# Altium PCB PCB_esp32_with_RTC_and_SD_card_2024-11-04.pcbdoc
Units mil, origin at the board's own origin, x right, y up, seen from the top; angles counter-clockwise.
Board outline 4380 x 3705 mil, 2 copper layers (Top Layer, Bottom Layer); 41 components, 29 nets, 177 pads, 50 vias.
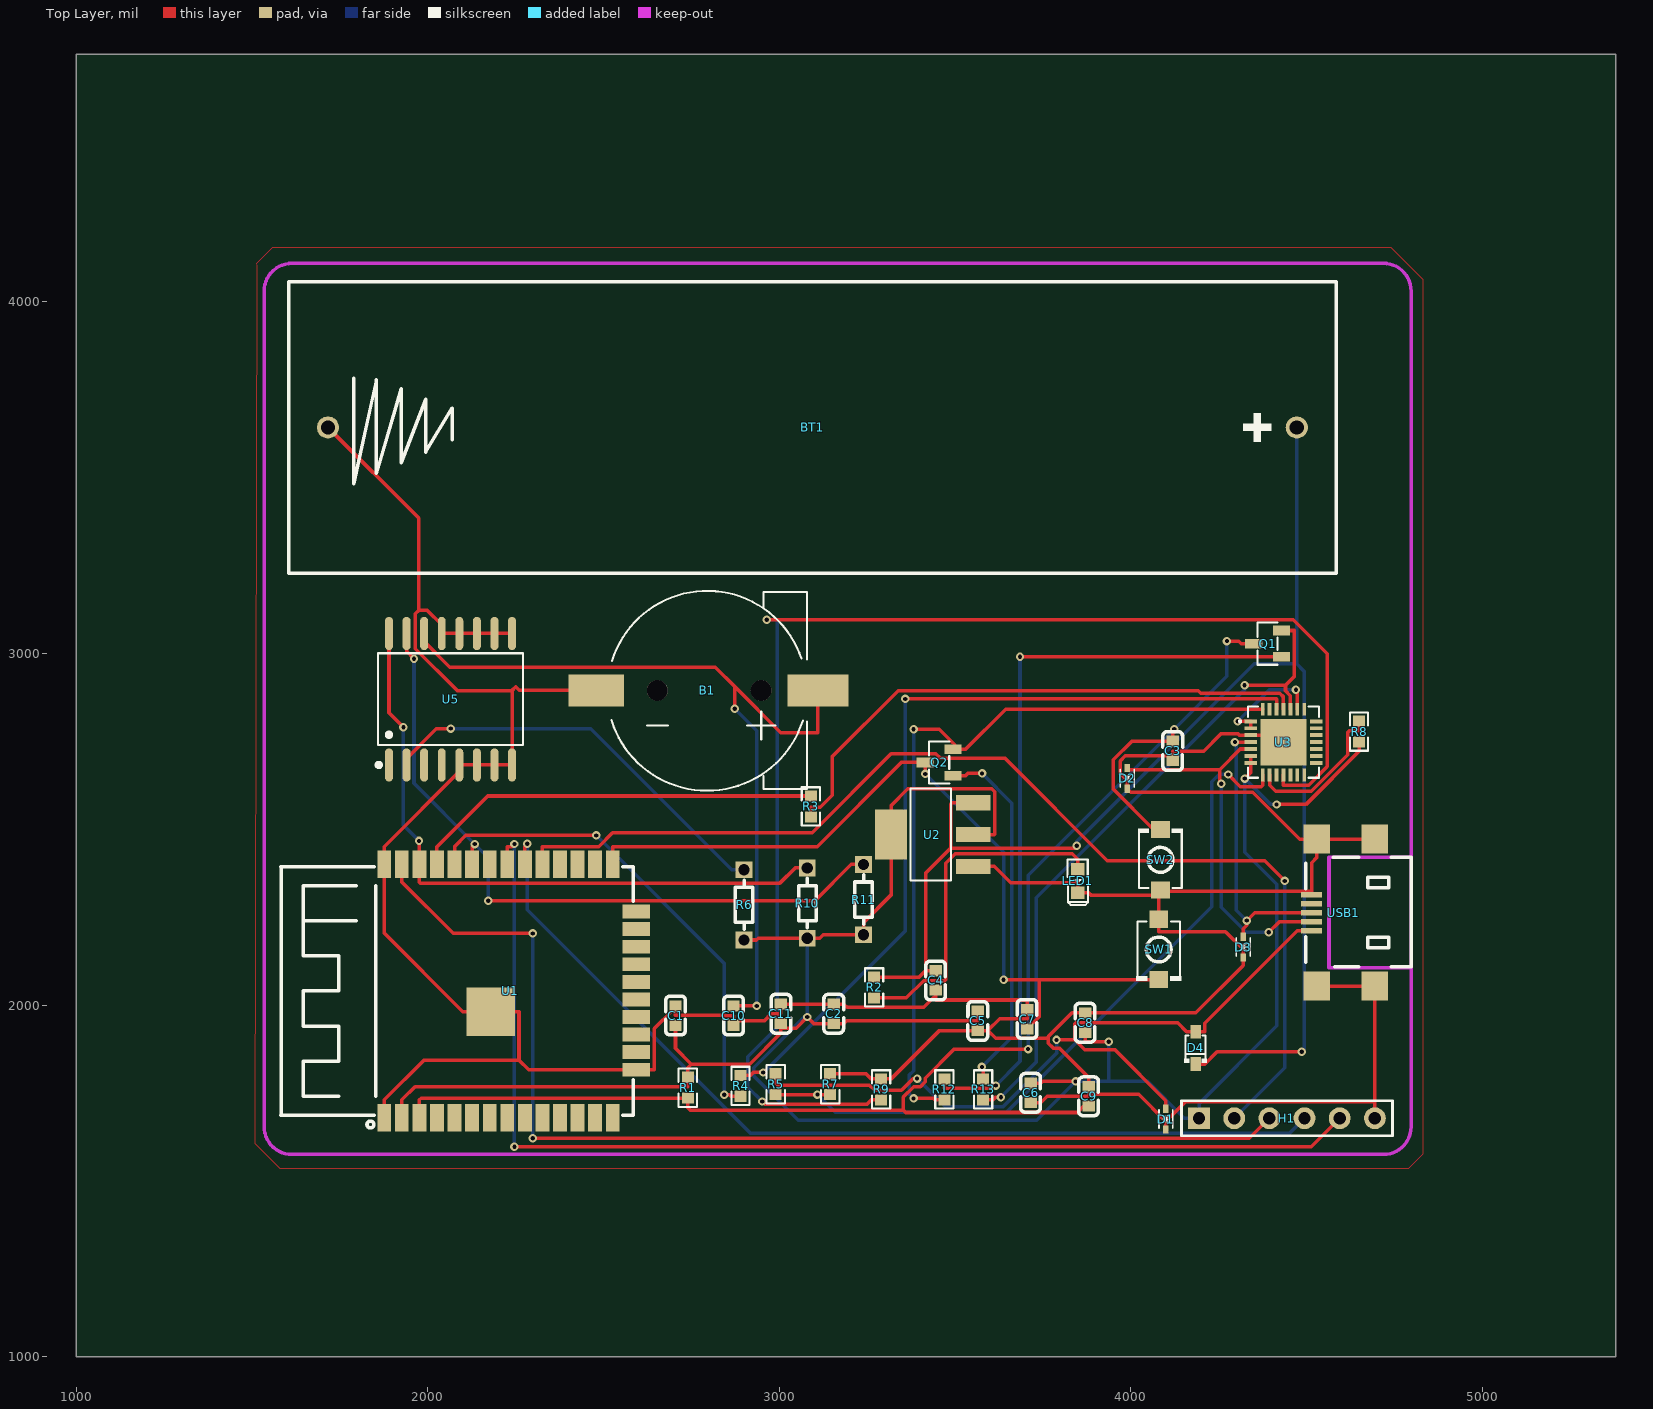
[diagram p0: Top Layer view]
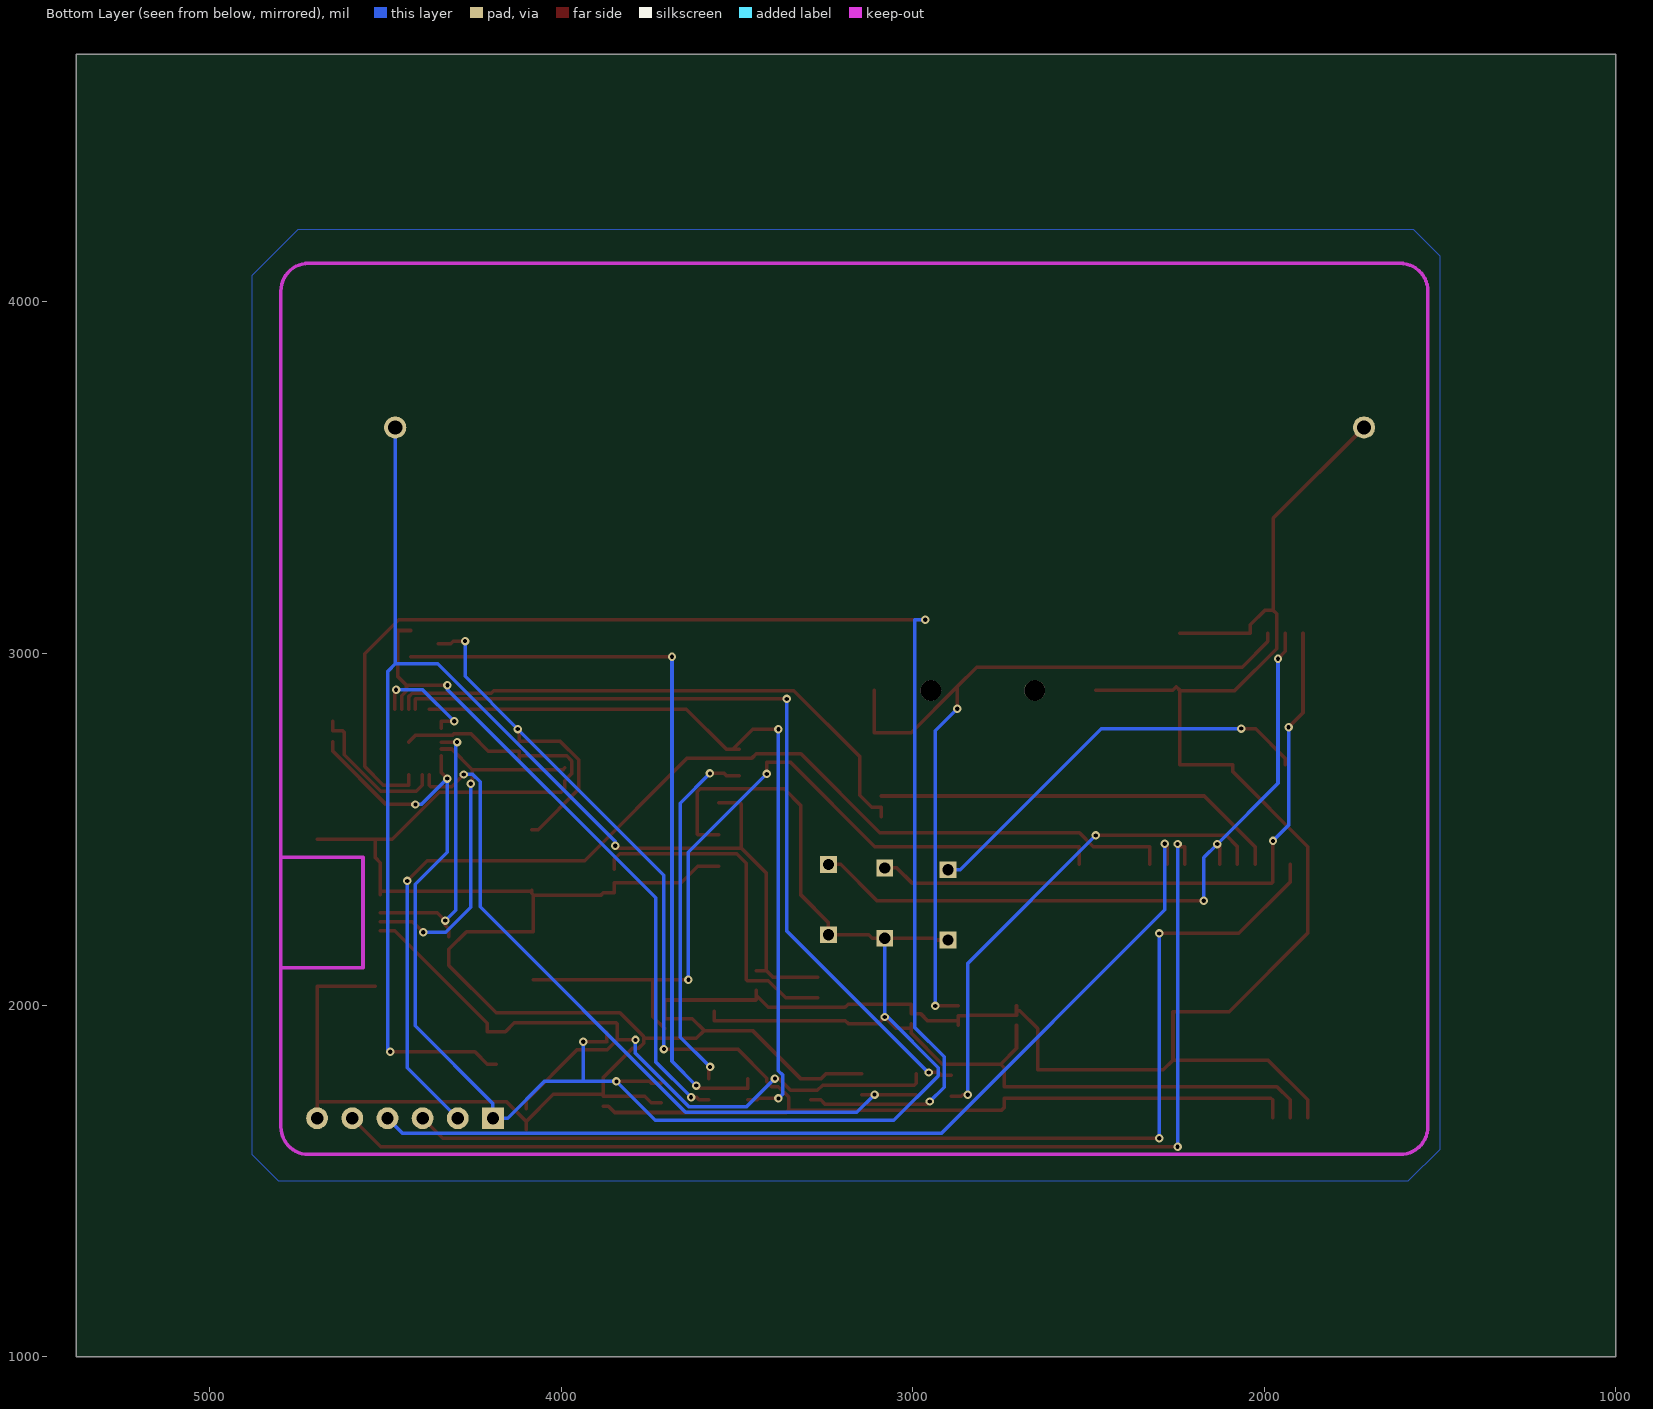
[diagram p1: Bottom Layer view, seen from below]

## Layer stack, top to bottom
Top Layer: signal copper (thickness not stored)
Dielectric: dielectric 12.6, FR-4, Dk 4.8
Bottom Layer: signal copper (thickness not stored)

## Board outline
5380,1000 1000,1000 1000,4705 5380,4705

## Components (designator, comment, footprint, x,y, rotation, side; value= is the part's Value field where it differs from the comment)
B1 "CR1220-2" BAT-SMD_CR1220-2 2795,2895 r180 top
BT1 "BH-18650-A1AJ005" BAT-TH_BH-18650-A1AJ005 3094.42,3643.01 r0 top
C1 "0.1u" C0603 2705,1970 r270 top
C2 "0.1uF/50V(10%)" C0603 3155,1975 r270 top
C3 "0.1u" C0603 4119.42,2723.01 r90 top
C4 "22uF10V(20%)" C0603 3445,2070 r90 top
C5 "0.1u" C0603 3565,1955 r90 top
C6 "0.1uF/50V(10%)" C0603 3715,1750 r270 top
C7 "0.1uF/50V(10%)" C0603 3705,1960 r270 top
C8 "10UF/10V(20%)" C0603 3870,1950 r90 top
C9 "0.1uF/50V(10%)" C0603 3880,1740 r270 top
C10 "0.1u" C0603 2870,1970 r270 top
C11 "0.1uF" C0603 3005,1975 r270 top
D1 "LESD5D5.0CT1G" SOD-523_L1.2-W0.8-LS1.6-BI 4100,1675.49 r90 top
D2 "LESD5D5.0CT1G" SOD-523_L1.2-W0.8-LS1.6-BI 3990,2645 r90 top
D3 "LESD5D5.0CT1G" SOD-523_L1.2-W0.8-LS1.6-BI 4320,2165 r90 top
D4 "BAT760-7" SOD-323_L1.8-W1.3-LS2.5-RD 4184.42,1878.01 r90 top
H1 "HDR-F-2.54_1x6" HDR-F-2.54_1X6 4394.42,1678.01 r0 top
LED1 "LED-0603_R" LED0603_RED 3849.42,2353.01 r270 top
Q1 "SS8050-G" SOT-23-3_L2.9-W1.3-P1.90-LS2.4-BR 4389.42,3028.01 r0 top
Q2 "SS8050-G" SOT-23-3_L2.9-W1.3-P1.90-LS2.4-BR 3455,2690 r0 top
R1 "10k(5%)" R0603 2740,1765 r90 top
R2 "2k(5%)" R0603 3270,2050 r90 top
R3 "1k" R0603 3090,2565 r270 top
R4 "1k" R0603 2890,1770 r90 top
R5 "22.1k(1%)" R0603 2990,1775 r270 top
R6 "VARISTOR-5" R-5 2900,2285 r270 top
R7 "47.5K(1%)" R0603 3145,1775 r270 top
R8 "2k(5%)" R0603 4649.42,2778.01 r270 top
R9 "10k(5%)(NC)" R0603 3290,1760 r90 top
R10 "VARISTOR-5" R-5 3080,2290 r90 top
R11 "VARISTOR-5" R-5 3240,2300 r90 top
R12 "10K(5%)" R0603 3470,1760 r90 top
R13 "10K(5%)" R0603 3580,1760 r90 top
SW1 "TS-1088R-02026" SW-SMD_L3.9-W3.0-P4.45 4079.42,2158.01 r270 top
SW2 "TS-1088R-02026" SW-SMD_L3.9-W3.0-P4.45 4084.42,2413.01 r90 top
U1 "ESP-WROOM-32E" COMM-SMD_ESP-WROOM-32D 2235,2040 r90 top
U2 "AMS1117-3.3_C18212698" SOT-223-3_L6.5-W3.4-P2.30-LS7.0-BR 3435,2485 r0 top
U3 "CP2102N-A02-GQFN28" QFN-28_L5.0-W5.0-P0.50-TL-EP3.3 4434.42,2748.01 r0 top
U5 "DS3231SN#_C722469" SOIC-16_L10.3-W7.5-P1.27-LS10.3-BL 2065,2870 r0 top
USB1 "U253-051T-4BH87-F-2" MICRO-USB-SMD_U253-051T-4BH87-S-2 4604.42,2263.01 r90 top

## Footprints (in the part's own frame and the unit in brackets; to place one, negate y for a bottom-side part, rotate by r counter-clockwise, add the part's x,y. Pads: shape width x height; smd on the part's side, far side on the other; paste and mask are expansions set on the pad)
BAT-SMD_CR1220-2 [mm]
  rect 4.4x2.3 smd paste+0 mask+0.05: 1(-8,0)
  rect 4x2.3 smd paste+0 mask+0.05: 2(8,0)
  round 1.5 hole 1.5 unplated paste+0: ""(-3.9,0) ""(3.6,0)
  silkscreen extent -7.22,-7.19 6.92,7.25
BAT-TH_BH-18650-A1AJ005 [mm]
  round 1.6 hole 1.02 paste+0 mask+0.051: 1(-35,0) 2(35,0)
  silkscreen extent -37.85,-10.54 37.85,10.54
C0603 [mm]
  rect 0.8x0.9 smd paste+0 mask+0.051: 1(-0.7,0) 2(0.7,0)
  silkscreen extent -1.41,-0.71 1.39,0.72
COMM-SMD_ESP-WROOM-32D [mm]
  rect 2x1.001 smd paste+0 mask+0.05: 1(-9.15,9.108) 2(-9.15,7.838) 3(-9.15,6.568) 4(-9.15,5.298) 5(-9.15,4.028) 6(-9.15,2.758) 7(-9.15,1.488) 8(-9.15,0.218) 9(-9.15,-1.052) 10(-9.15,-2.322) 11(-9.15,-3.592) 12(-9.15,-4.862) 13(-9.15,-6.132) 14(-9.15,-7.402) 25(9.15,-7.402) 26(9.15,-6.132) 27(9.15,-4.862) 28(9.15,-3.592) 29(9.15,-2.322) 30(9.15,-1.052) 31(9.15,0.218) 32(9.15,1.488) 33(9.15,2.758) 34(9.15,4.028) 35(9.15,5.298) 36(9.15,6.568) 37(9.15,7.838) 38(9.15,9.108)
  rect 1.001x2 smd paste+0 mask+0.05: 15(-5.69,-9.108) 16(-4.42,-9.108) 17(-3.15,-9.108) 18(-1.88,-9.108) 19(-0.61,-9.108) 20(0.66,-9.108) 21(1.93,-9.108) 22(3.2,-9.108) 23(4.47,-9.108) 24(5.74,-9.108)
  rect 3.5x3.5 smd paste+0 mask+0.05: 39(-1.492,1.399)
  silkscreen extent -9.9,-8.9 8.99,16.6
HDR-F-2.54_1X6 [mil]
  rect 62x62 hole 35 paste+0 mask+2: 1(-200,0)
  round 62 hole 35 paste+0 mask+2: 2(-100,0) 3(0,0) 4(100,0) 5(200,0) 6(300,0)
  silkscreen extent -250,-50 350,50
LED0603_RED [mm]
  rect 0.9x1 smd paste+0 mask+0.051: 1(-0.85,0) 2(0.85,0)
  silkscreen extent -1.54,-0.73 1.75,0.73
MICRO-USB-SMD_U253-051T-4BH87-S-2 [mm]
  rect 0.4x1.524 smd paste+0 mask+0.051: 1(-1.3,2.288) 2(-0.65,2.288) 3(0,2.288) 4(0.65,2.288) 5(1.3,2.288)
  rect 2.1x1.9 smd paste+0 mask+0.051: 6(5.307,1.913) 7(5.307,-2.288) 8(-5.307,-2.288) 9(-5.307,1.913)
  Keep-Out Layer lines w0.254: -3.98,1.031 -3.971,-4.905 ; 4.013,1.031 4.006,-4.868 ; -3.988,1.028 4.012,1.028
  silkscreen extent -3.9,-4.9 4,2.7
QFN-28_L5.0-W5.0-P0.50-TL-EP3.3 [mm]
  rect 0.905x0.28 smd paste-100 mask+0.051: 1(-2.377,1.5) 2(-2.377,1) 3(-2.377,0.5) 4(-2.377,0) 5(-2.377,-0.5) 6(-2.377,-1) 7(-2.377,-1.5) 15(2.377,-1.5) 16(2.377,-1) 17(2.377,-0.5) 18(2.377,0) 19(2.377,0.5) 20(2.377,1) 21(2.377,1.5)
  rect 0.28x0.905 smd paste-100 mask+0.051: 8(-1.5,-2.377) 9(-1,-2.377) 10(-0.5,-2.377) 11(0,-2.377) 12(0.5,-2.377) 13(1,-2.377) 14(1.5,-2.377) 22(1.5,2.378) 23(1,2.378) 24(0.5,2.378) 25(0,2.378) 26(-0.5,2.378) 27(-1,2.378) 28(-1.5,2.378)
  rect 3.35x3.35 smd paste-100 mask+0.051: 29(0,0)
  silkscreen extent -3.2,-2.58 2.58,2.58
R0603 [mil]
  rect 31.75x34.02 smd paste-3937.01 mask+2: 1(-29.65,0) 2(29.66,0)
  silkscreen extent -55,-26 55,26
R-5 [mil]
  rect 47.7x47.7 hole 32 paste+0 mask+2: 1(-100,0) 2(100,0)
  silkscreen extent -70,-25 70,25
SOD-323_L1.8-W1.3-LS2.5-RD [mm]
  rect 1x0.75 smd paste+0 mask+0.051: 1(-1.173,0) 2(1.173,0)
  silkscreen extent -1.08,-0.8 0.9,0.8
SOD-523_L1.2-W0.8-LS1.6-BI [mm]
  rect 0.6x0.4 smd paste+0 mask+0.051: 1(-0.75,0) 2(0.75,0)
  silkscreen extent -0.65,-0.5 0.65,0.5
SOIC-16_L10.3-W7.5-P1.27-LS10.3-BL [mil]
  oval 22.6x94.51 smd paste+0 mask+2: 1(-175,-187.02) 2(-125,-187.02) 3(-75,-187.02) 4(-25,-187.02) 5(25,-187.02) 6(75,-187.02) 7(125,-187.02) 8(175,-187.02) 9(175,187.02) 10(125,187.02) 11(75,187.02) 12(25,187.02) 13(-25,187.02) 14(-75,187.02) 15(-125,187.02) 16(-175,187.02)
  silkscreen extent -210,-193 206,131
SOT-23-3_L2.9-W1.3-P1.90-LS2.4-BR [mm]
  rect 1.25x0.7 smd paste+0 mask+0.051: 1(1,-0.95) 2(1,0.95) 3(-1,0)
  silkscreen extent -0.73,-1.53 0.73,1.53
SOT-223-3_L6.5-W3.4-P2.30-LS7.0-BR [mm]
  rect 2.5x1.1 smd paste+0 mask+0.051: 1(2.97,-2.3) 2(2.97,0) 3(2.97,2.3)
  rect 2.34x3.6 smd paste+0 mask+0.051: 4(-2.97,0)
  silkscreen extent -1.57,-3.33 1.37,3.33
SW-SMD_L3.9-W3.0-P4.45 [mm]
  rect 1.23x1.36 smd paste+0 mask+0.051: 1(-2.185,0) 2(2.185,0)
  silkscreen extent -2.03,-1.62 2.25,1.62

## Via types
v1: diameter 24, hole 12, Top Layer to Bottom Layer, tented both sides, 50 vias

## Nets (pads, with @x,y where several pads share a name; then routed paths per layer and width w, separated by ;. In a path a pad name is that pad's centre, name@x,y a point inside that pad or via, vN(x,y) a via of type N, cw(c..) or ccw(c..) an arc to the next point about the centre after c; other vN are vias at no path point)
CTS: U3.1 U3.2 U3.23 | length 315.3
  Top Layer w10: v1(4304.66,2807.06) 4311.99,2807.07 U3.1 U3.2 ; v1(4469.84,2896.99) 4473.8,2893.03 U3.23
  Bottom Layer w10: v1(4304.66,2807.06) 4394.59,2896.99 v1(4469.84,2896.99)
DTR: Q2.2 R12.1 U3.28 | length 2232.2
  Top Layer w10: v1(3382.21,1734.35) 3437.97,1734.36 3441.99,1730.35 R12.1 ; v1(3382.21,2784.47) 3455.11,2784.47 Q2.2@3512.18,2727.41 ; Q2.2 Q2.2@3512.18,2727.41 ; U3.28 3644.2,2841.61 3529.99,2727.41 Q2.2@3512.18,2727.41
  Bottom Layer w10: v1(3382.21,1734.35) 3369.26,1747.3 3369.26,1800.46 3382.2,1813.4 v1(3382.21,2784.47)
EN: C3.2 C9.2 Q1.3 R1.1 SW2.2 U1.3 | length 4417.2
  Top Layer w10: U1.3 1976.41,1730.14 1981.62,1735.35 R1.1 2740.01,1708.46 2747.07,1701.4 3353.26,1701.4 ; v1(3708,1874.77) 3498.34,1874.78 3415.36,1791.8 3415.36,1781.36 3401.88,1767.87 3382.74,1767.87 3353.26,1738.38 3353.26,1701.4 ; C9.2 3865.64,1712.44 3847.53,1694.34 3360.34,1694.34 3353.26,1701.4 ; SW2.2 4065.53,2499.03 3950.18,2614.39 3950.18,2697.26 4003.49,2750.57 C3.2 4119.43,2780.84 v1(4123.5,2784.9) ; v1(4273.49,3035.22) 4307.23,3035.22 4314.44,3028.01 Q1.3
  Bottom Layer w10: v1(3708,1874.77) 3707.99,2369.41 v1(4123.5,2784.9) 4273.48,2934.89 v1(4273.49,3035.22)
EXT_5V: BT1.2 C4.2 D4.1 R2.2 U2.3 | length 4064.1
  Top Layer w10: R2.2 3398.38,2079.66 3416.28,2097.57 ; C4.2 3441.11,2097.57 3416.28,2097.57 ; U2.3 3491.7,2575.55 3487.95,2571.8 3487.95,2446.66 ; v1(3846.67,2452.96) 3840.36,2446.66 3487.95,2446.66 ; D4.1@4184.43,1831.86 4210.19,1831.86 4245.39,1867.05 v1(4486.3,1867.04) ; 3416.28,2097.57 3416.28,2374.99 3487.95,2446.66
  Bottom Layer w10: v1(3846.67,2452.96) 3846.66,2465.22 4351.81,2970.36 4472.38,2970.36 ; BT1.2 4472.38,2970.36 ; v1(4486.3,1867.04) 4492.9,1873.64 4492.9,2949.84 4472.38,2970.36
GND: B1.2 BT1.1 C1.1 C2.1 C3.1 C4.1 C5.1 C6.2 C7.1 C8.2 C9.1 C10.2 C11.1 D1.1 D2.1 D3.1 H1.6 LED1.2 R7.1 R9.2 SW1.1 SW2.1 U1.1 U1.15 U1.38 U1.39 U2.1 U3.3 U3.29 U5.5 U5.6 U5.7 U5.8 U5.9 U5.10 U5.11 U5.12 U5.13 USB1.5 USB1.6 USB1.7 USB1.8 USB1.9 | length 11692.1
  Top Layer w10: BT1.1 1974.12,3385.36 1974.12,3122.38 ; U1.1 1876.41,1730.14 1989.54,1843.27 2259.82,1843.27 ; U5.9 U5.10 U5.11 U5.12 U5.13 2040.01,3081.55 1999.17,3122.38 1974.12,3122.38 ; B1.2 2260.3,2895 2250.29,2905.01 2240.01,2894.72 ; C1.1 C1.1@2705.01,1984.18 ; C10.2 C10.2@2870.01,1955.83 ; R7.1 3173.03,1804.66 3246.99,1804.66 3261.99,1789.66 3275.99,1789.66 R9.2 3318.03,1789.66 3455.8,1927.44 C5.1 3593.74,1927.44 ; C4.1 C4.1@3445.01,2027.47 ; U2.1@3551.93,2394.45 3612.16,2394.45 3658.34,2348.28 3849.43,2348.28 LED1.2 3880.11,2319.55 3886.76,2312.91 SW2.1@4079.43,2312.91 ; C6.2 3743.74,1722.44 3762.09,1740.81 3880.01,1740.81 3880.01,1746.4 ; SW2.1 SW2.1@4084.43,2323.24 ; D1.1 4100.01,1668.8 ; C3.1 C3.1@4119.43,2708.84 ; U3.29 4414.74,2767.7 U3.3 4309.09,2767.7 4305.72,2771.07 4256.18,2771.07 4207.32,2722.22 4119.43,2722.22 C3.1@4119.43,2708.84 ; USB1.5 4514.36,2323.24 ; USB1.9 USB1.8@4694.43,2054.07 ; H1.6 4694.43,1724.46 ; USB1.8 USB1.8@4694.43,2054.07 ; USB1.7 USB1.6 ; 1974.12,3122.38 1965.01,3113.26 1965.01,3013.78 2084.07,2894.72 2240.01,2894.72 ; 2240.01,2894.72 U5.8 U5.7 U5.6 U5.5 2090.01,2664.22 1876.41,2450.62 U1.38 1876.41,2204.86 2100.01,1981.28 U1.39 2259.82,1981.28 2259.82,1843.27 ; 2259.82,1843.27 2287.09,1815.99 U1.15 2643.97,1815.99 2644.74,1816.76 2644.74,1933.13 2695.78,1984.18 C1.1@2705.01,1984.18 ; C1.1@2705.01,1984.18 2705.01,1970.81 2841.64,1970.81 2843.24,1969.2 2870.01,1969.2 C10.2@2870.01,1955.83 ; C10.2@2870.01,1955.83 2958.26,1955.83 2978.24,1975.81 3005.01,1975.81 C11.1 C2.1 3183.74,2002.57 3192.89,1993.41 3410.95,1993.41 C4.1@3445.01,2027.47 ; C4.1@3445.01,2027.47 3445.01,2015.68 3446.36,2014.33 3705.01,2014.33 C7.1 3705.01,1960.81 3627.09,1960.81 3593.74,1927.44 ; 3593.74,1927.44 3615.55,1905.63 3765.82,1905.63 ; 3765.82,1905.63 3765.82,1891.28 3779.32,1877.78 3796.55,1877.78 3880.01,1794.33 C9.1 3880.01,1746.4 ; 3765.82,1905.63 3765.82,1910.38 3833.01,1977.57 3841.28,1977.57 C8.2 4184.91,1977.57 4320.01,2112.66 D3.1 4320.01,2158.3 4269.49,2208.82 4079.43,2208.82 SW1.1 4079.43,2261.66 4079.43,2279.26 SW2.1@4079.43,2312.91 ; 3880.01,1746.4 4022.39,1746.4 4100.01,1668.8 ; SW2.1@4079.43,2312.91 4084.43,2317.91 SW2.1@4084.43,2323.24 ; SW2.1@4084.43,2323.24 4514.36,2323.24 ; 4100.01,1668.8 4155.68,1724.46 4694.43,1724.46 ; C3.1@4119.43,2708.84 3984.61,2708.84 3969.84,2694.05 3969.84,2658.47 3990.01,2638.3 3990.01,2626.89 D2.1 4000.32,2605.16 4347.52,2605.16 4480.72,2471.95 USB1.6 ; 4514.36,2323.24 4514.36,2404.84 4529.12,2419.61 USB1.6 ; 4694.43,1724.46 USB1.8@4694.43,2054.07
GPIO0: C7.2 Q2.3 SW1.2 U1.25 | length 2343.9
  Top Layer w10: U1.25 2526.41,2450.62 3108.09,2450.62 3347.47,2690.01 Q2.3 v1(3415.64,2657.63) ; v1(3638.34,2071.99) 3739.38,2071.99 ; C7.2 3739.38,1966.82 3739.38,2071.99 ; SW1.2 3739.38,2071.99
  Bottom Layer w10: v1(3415.64,2657.63) 3638.34,2434.93 v1(3638.34,2071.99)
LED1_1: LED1.1 R2.1 | length 978.5
  Top Layer w10: R2.1 3361.76,2020.35 3410.68,2069.26 3470.88,2069.26 3473.78,2072.16 3473.78,2403.41 3500.99,2430.61 3834.03,2430.61 3849.43,2415.2 LED1.1
R7_2: R5.2 R7.2 U3.8 | length 2094.1
  Top Layer w10: R5.2 v1(3108.63,1745.34) 3116.99,1745.35 R7.2 ; v1(4277.37,2655.84) 4312.01,2621.2 4370.98,2621.2 4375.38,2625.59 U3.8
  Bottom Layer w10: v1(3108.63,1745.34) 3158.91,1695.07 3646.49,1695.07 4230.93,2279.49 4230.93,2635.53 4251.24,2655.84 v1(4277.37,2655.84)
R8_1: R8.1 U3.9 | length 426
  Top Layer w10: U3.9@4395.06,2654.41 4395.06,2625.59 4412.52,2608.12 4513.36,2608.12 4617.05,2711.8 4617.05,2775.3 4622.53,2780.78 4649.43,2780.78 R8.1
R9_1: R9.1 U3.11 | length 3929.9
  Top Layer w10: v1(2951.64,1725.64) 2958.86,1718.41 3250.05,1718.41 3261.99,1730.35 R9.1 ; v1(2964.43,3095.72) 4462.69,3095.72 4559.44,2998.97 4559.44,2678.64 4506.36,2625.55 4434.47,2625.55 4434.43,2625.59 U3.11
  Bottom Layer w10: v1(2951.64,1725.64) 2910.9,1766.4 2910.9,1852.7 2995,1936.8 2995,3095.7 v1(2964.43,3095.72)
R12_2: Q1.1 R12.2 | length 2168.6
  Top Layer w10: R12.2 3470.01,1762.78 3470.05,1762.72 3608.07,1762.72 v1(3616.17,1770.81) ; v1@3684.95,2990.61 4393.18,2990.61 Q1.1
  Bottom Layer w10: v1(3616.17,1770.81) 3684.95,1839.6 v1@3684.95,2990.61
  other v1: 3684.95,2990.61
R13_2: Q2.1 R13.2 | length 1025.9
  Top Layer w10: Q2.1 3529.99,2652.61 3536.16,2658.76 v1(3577.16,2658.76) ; v1(3576.7,1824) 3576.7,1819.86 3580.01,1816.55 R13.2
  Bottom Layer w10: v1(3576.7,1824) 3661.59,1908.9 3661.59,2574.32 v1(3577.16,2658.76)
RTS: Q1.2 R13.1 U3.24 | length 1904.6
  Top Layer w10: R13.1 3608.03,1730.35 3615.22,1737.55 v1(3630.66,1737.54) ; v1(4323.86,2909.81) 4440.19,2909.82 ; Q1.2 4464.41,3065.41 4464.47,3065.36 4464.47,2934.09 4440.19,2909.82 ; U3.24 4454.11,2880.12 4440.19,2894.05 4440.19,2909.82
  Bottom Layer w10: v1(3630.66,1737.54) 3731.05,1837.93 3731.05,2304.72 4323.85,2897.53 v1(4323.86,2909.81)
RXD: R3.2 U3.25 | length 1615.3
  Top Layer w10: R3.2 3090.01,2562.24 3116.89,2562.24 3151.39,2596.72 3151.39,2706.99 3338.28,2893.89 4192.06,2893.89 4199.19,2886.76 4423.97,2886.76 4434.43,2876.3 U3.25
RXD0: R4.1 U1.34 | length 1403.3
  Top Layer w10: U1.34 2076.41,2450.62 2108.45,2482.66 v1@2479.39,2482.66 ; v1(2843.82,1745.07) 2857.26,1745.08 2861.99,1740.35 R4.1
  Bottom Layer w10: v1@2479.39,2482.66 2843.82,2118.22 v1(2843.82,1745.07)
  other v1: 2479.39,2482.65
SCL: R10.2 U1.36 U5.16 | length 1865.5
  Top Layer w10: U5.16 1890.01,2831.45 v1(1931.1,2790.35) ; v1(1975.34,2466.87) 1976.41,2465.8 U1.36 1976.41,2349.86 1979.21,2347.07 3002.2,2347.07 3045.14,2390.01 R10.2
  Bottom Layer w10: v1(1931.1,2790.35) 1931.1,2511.11 v1(1975.34,2466.87)
SDA: R11.2 U1.33 U5.15 | length 2027.9
  Top Layer w10: U5.15 1940.01,3005.93 v1(1961.11,2984.83) ; U1.33 2126.41,2450.62 2126.72,2450.62 v1(2133.96,2457.86) ; v1(2172.21,2296.75) 3101.89,2296.76 3205.14,2400.01 R11.2
  Bottom Layer w10: v1(1961.11,2984.83) 1961.11,2630.72 v1(2133.96,2457.86) 2172.2,2419.61 v1(2172.21,2296.75)
TXD: R4.2 U3.26 | length 2384
  Top Layer w10: R4.2 2918.03,1799.66 2926.57,1808.2 v1(2954.33,1808.2) ; v1(3358.58,2870.71) 4414.48,2870.72 4414.74,2870.45 U3.26
  Bottom Layer w10: v1(2954.33,1808.2) 2956.2,1808.2 3358.57,2210.57 v1(3358.58,2870.71)
TXD0: R3.1 U1.35 | length 1173.6
  Top Layer w10: U1.35 2026.41,2450.62 2170.45,2594.66 R3.1
U5_2: R6.1 U5.2 | length 1179.9
  Top Layer w10: U5.2 1940.01,2701.47 2024.92,2786.39 v1(2065.61,2786.39)
  Bottom Layer w10: v1(2065.61,2786.39) 2463.76,2786.39 2865.14,2385.01 R6.1
U5_14: B1.1 C10.1 U5.14 | length 2370.1
  Top Layer w10: U5.14 1990.01,3034.3 2062.97,2961.34 2817.93,2961.34 2874.26,2905.01 2873.26,2903.99 v1@2873.26,2842.86 ; C10.1 v1(2936.13,1997.56) ; 2874.3,2905 3004.3,2775 3110,2775 B1.1
  Bottom Layer w10: v1@2873.26,2842.86 2936.12,2779.99 v1(2936.13,1997.56)
  other v1: 2873.26,2842.85
USB_DN: D2.2 U3.5 USB1.2 | length 1069.8
  Top Layer w10: D2.2 3995.89,2668.64 4253.44,2668.64 ; v1(4257.62,2629.23) 4253.44,2633.41 4253.44,2668.64 ; U3.5 4311.99,2728.32 4253.44,2669.76 4253.44,2668.64 ; v1(4392.42,2206.82) 4423.02,2237.43 USB1.2
  Bottom Layer w10: v1(4257.62,2629.23) 4257.61,2278.2 4328.98,2206.82 v1(4392.42,2206.82)
USB_DP: D3.2 U3.4 USB1.3 | length 810.1
  Top Layer w10: v1(4296.16,2748.01) U3.4 ; D3.2 4320.01,2217.36 4329.99,2227.34 v1(4330,2240.18) 4352.82,2263.01 USB1.3
  Bottom Layer w10: v1(4296.16,2748.01) 4300.41,2743.76 4300.41,2269.76 v1(4330,2240.18)
VBUS: D1.2 D4.2 R5.1 USB1.1 | length 2251.1
  Top Layer w10: R5.1 2990.01,1777.78 2995.49,1772.29 3256.66,1772.29 3271.66,1757.29 3347.7,1757.29 3381.34,1790.91 v1(3392.32,1790.91) ; v1(3788.87,1900.82) 3841.22,1900.83 ; D1.2 4100.01,1727.85 3955.39,1872.46 3869.59,1872.46 3841.22,1900.83 ; USB1.1 4473.35,2211.84 4210.19,1948.67 4210.19,1924.17 4197.31,1924.17 D4.2 4158.65,1924.17 4133.59,1949.24 3844.12,1949.24 3841.22,1946.35 3841.22,1900.83
  Bottom Layer w10: v1(3392.32,1790.91) 3471.93,1711.3 3637.07,1711.3 3788.86,1863.1 v1(3788.87,1900.82)
VDD3V3: C1.2 C2.2 C5.2 C6.1 C8.1 C11.2 H1.1 R1.2 R6.2 R8.2 R10.1 R11.1 U1.2 U2.2 U2.4 U3.6 U3.7 | length 7069.9
  Top Layer w10: U1.2 1926.41,1730.14 1964.05,1767.78 2740.01,1767.78 2740.01,1781.22 R1.2 2740.01,1821.55 2750.05,1831.6 ; C1.2 2705.01,1876.64 2750.05,1831.6 ; R6.2 2934.86,2185.01 2939.86,2190.01 R10.1 3097.43,2190.01 3114.86,2190.01 3124.86,2200.01 R11.1 3240.01,2234.86 3318.07,2312.93 U2.4 3318.07,2566.89 3366.14,2614.95 3605.01,2614.95 3613.03,2606.93 3613.03,2485.88 3612.16,2485.01 U2.2 ; C11.2 C11.2@3005.01,1934.07 ; C5.2 3565.01,1955.81 3192.09,1955.81 3183.74,1947.44 C2.2 3130.26,1947.44 3098.57,1947.44 v1(3080.01,1966.01) 3048.05,1934.07 C11.2@3005.01,1934.07 ; C6.1 3743.74,1777.57 3748.95,1782.78 v1(3843.08,1782.77) ; C8.1 3870.01,1895.68 3870.18,1895.52 v1(3937.39,1895.51) ; v1@4324.23,2644.26 4340.82,2660.86 U3.7 U3.6 ; v1(4414.91,2570.52) 4498.48,2570.53 4649.43,2721.47 R8.2 ; 2750.05,1831.6 2915.91,1831.6 3005.01,1920.68 C11.2@3005.01,1934.07
  Bottom Layer w10: R10.1 v1(3080.01,1966.01) 3071.74,1966.02 2927.66,1821.92 2927.66,1798.28 3053.66,1672.28 3732.57,1672.28 v1(3843.08,1782.77) 3937.39,1782.78 ; v1(3937.39,1895.51) 3937.39,1782.78 ; v1(4414.91,2570.52) 4397.95,2570.53 4324.23,2644.26 4324.23,2434.53 4415.48,2343.28 4415.48,1941.08 4194.43,1720.03 H1.1 4152.41,1678.02 4047.66,1782.78 3937.39,1782.78
  other v1: 4324.23,2644.25
VSPI_CLK: H1.4 U1.30 | length 2740.5
  Top Layer w10: U1.30 2276.41,2451.68 v1(2283.27,2458.53)
  Bottom Layer w10: v1(2283.27,2458.53) 2283.26,2270.59 2917.91,1635.95 4452.36,1635.95 H1.4
VSPI_CS: H1.2 U1.29 | length 3156.2
  Top Layer w10: U1.29 2326.41,2450.62 2326.47,2450.68 2486.43,2450.68 2525.95,2490.2 3093.53,2490.2 3318.18,2714.84 3445.16,2714.84 3457.45,2702.57 3641.36,2702.57 3933.66,2410.26 4381.09,2410.26 v1(4438.24,2353.11)
  Bottom Layer w10: H1.2 4438.23,1821.83 v1(4438.24,2353.11)
VSPI_MISO: H1.5 U1.31 | length 3316.6
  Top Layer w10: U1.31 2226.41,2450.62 2239.32,2450.62 v1@2246.76,2458.05 ; v1(2246.76,1596.62) 4513.03,1596.62 H1.5
  Bottom Layer w10: v1(2246.76,1596.62) v1@2246.76,2458.05
  other v1: 2246.76,2458.05
VSPI_MOSI: H1.3 U1.37 | length 3185.3
  Top Layer w10: U1.37 1926.41,2349.86 2072.51,2203.78 v1(2298.72,2203.77) ; v1(2298.72,1621.01) 4337.43,1621.02 H1.3
  Bottom Layer w10: v1(2298.72,1621.01) v1(2298.72,2203.77)
pads on no net: B1. U1.4 U1.5 U1.6 U1.7 U1.8 U1.9 U1.10 U1.11 U1.12 U1.13 U1.14 U1.16 U1.17 U1.18 U1.19 U1.20 U1.21 U1.22 U1.23 U1.24 U1.26 U1.27 U1.28 U1.32 U3.10 U3.12 U3.13 U3.14 U3.15 U3.16 U3.17 U3.18 U3.19 U3.20 U3.21 U3.22 U3.27 U5.1 U5.3 U5.4 USB1.4

## Polygon pours and split planes (outlines as drawn)
GND on Bottom Layer (solid): 4880,1575 4805,1500 1590,1500 1500,1590 1500,4130 1575,4205 4750,4205 4880,4075 4880,1575
GND on Top Layer (solid): 4830,1575 4790,1535 1580,1535 1510,1605 1515,4105 1514.44,4109.44 1560,4155 4740,4155 4830,4065 4830,1575

## Keep-outs
Keep-Out Layer:
  lines w10: 1535,1653.74 ccw(c1613.74,1653.74) 1613.74,1575 ; 1535,4031.25 cw(c1613.74,4031.25) 1613.74,4109.99 ; 4718.81,1575 ccw(c4718.81,1653.74) 4797.55,1653.74 ; 4718.81,4109.99 cw(c4718.81,4031.25) 4797.55,4031.25